# Altium PCB USB to Serial Programmer.PcbDoc
Units mm, origin at the board's own origin, x right, y up, seen from the top; angles counter-clockwise.
Board outline 17.23 x 33.97 mm, 2 copper layers (Top Layer, Bottom Layer); 15 components, 19 nets, 57 pads, 20 vias.
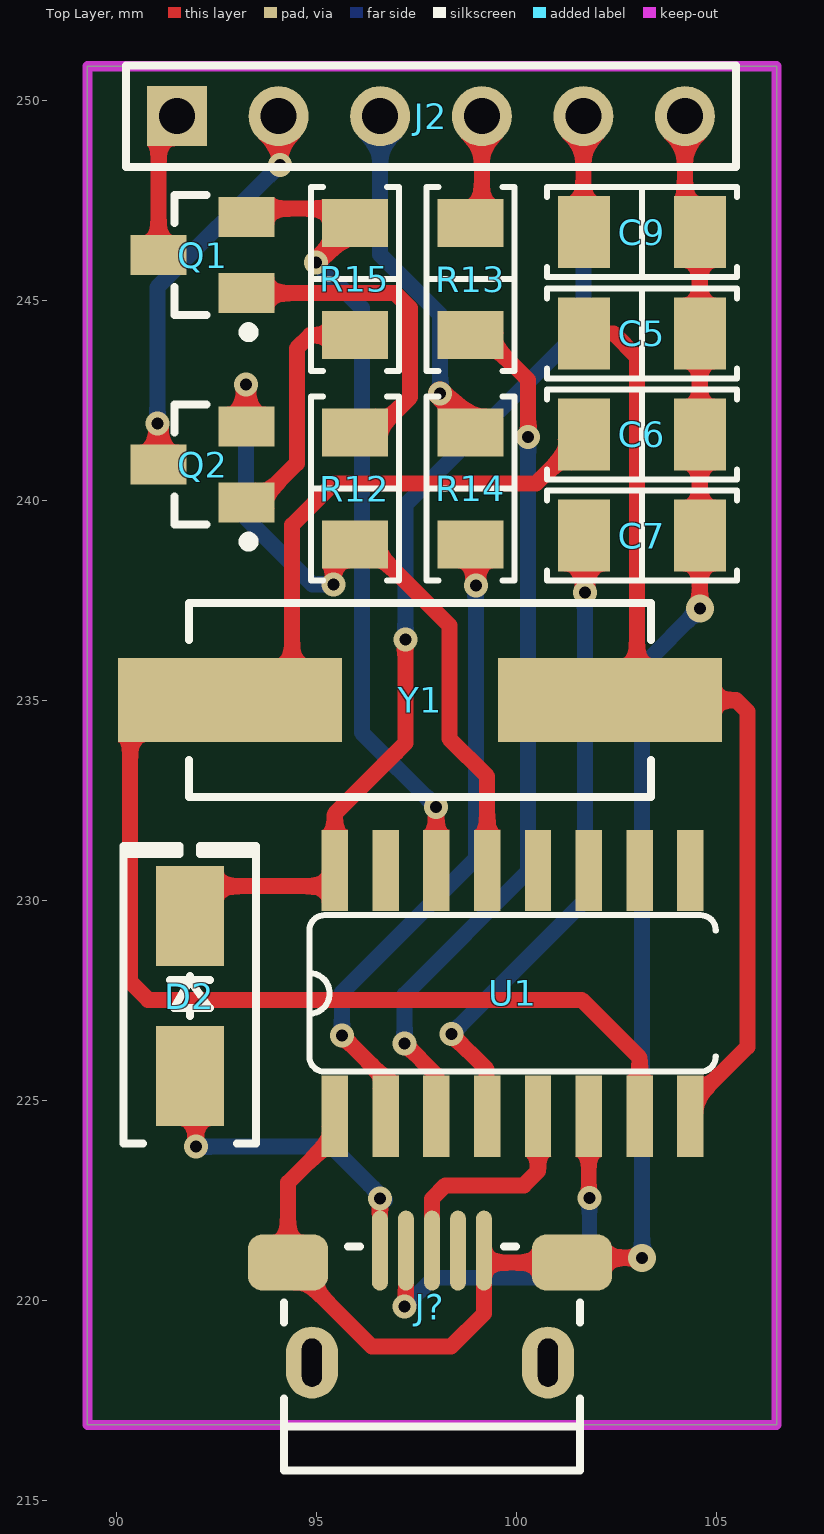
[diagram p0: Top Layer view]
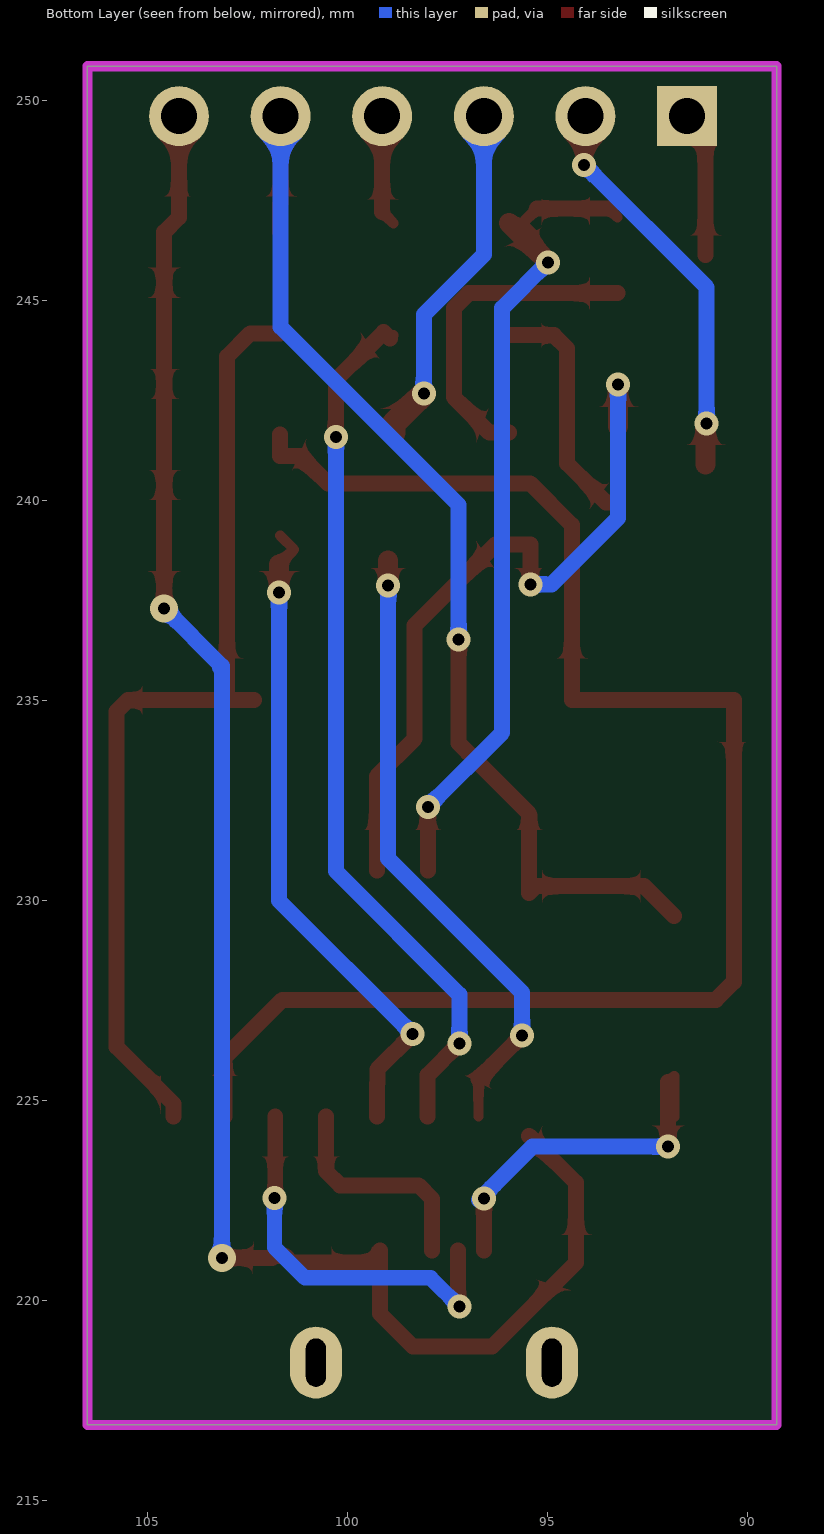
[diagram p1: Bottom Layer view, seen from below]
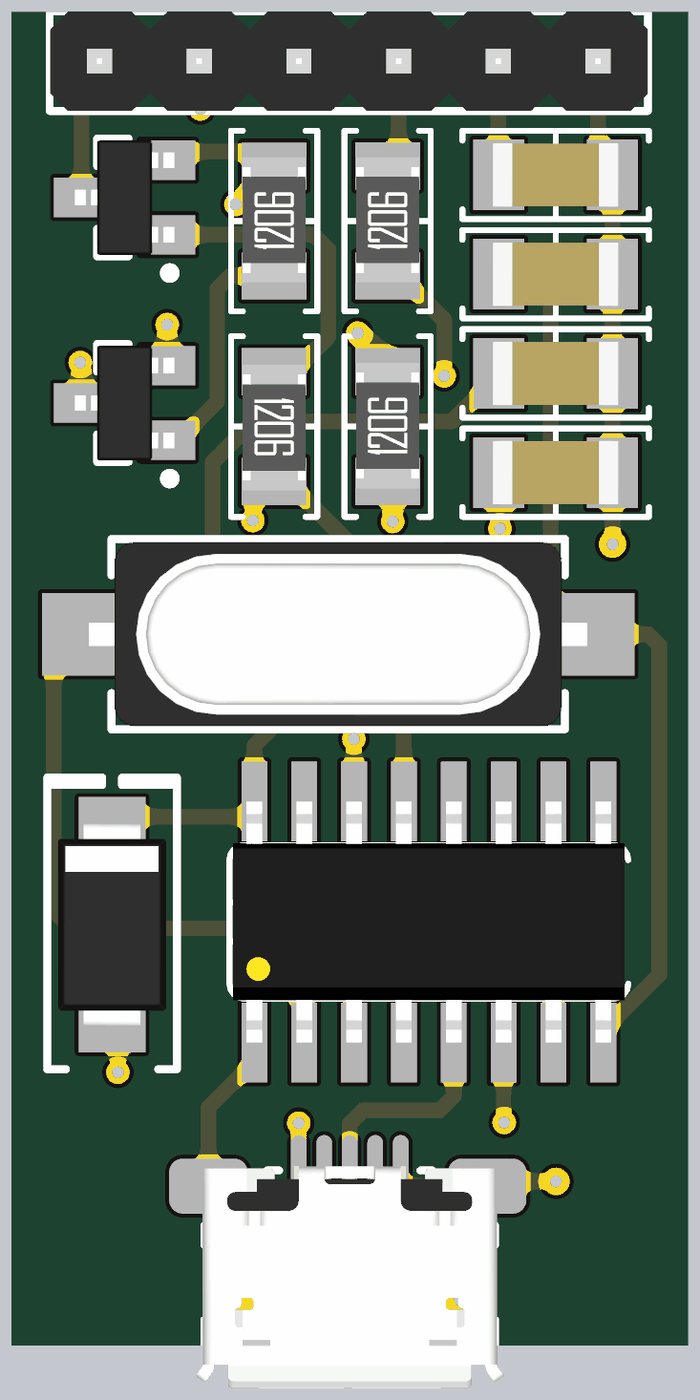
[diagram p2: 3D render of the assembled board from above, using the file's embedded part models]

## Layer stack, top to bottom
Top Solder: solder mask 0.0102, Solder Resist, Dk 3.5
Top Layer: signal copper 0.0356
Dielectric 1: dielectric 0.32, FR-4, Dk 4.8
Bottom Layer: signal copper 0.0356
Bottom Solder: solder mask 0.0102, Solder Resist, Dk 3.5

## Board outline
89.281,216.88 106.51,216.88 106.51,250.85 89.281,250.85

## Design rules (kind name [scope] priority, off if disabled: settings)
Clearance [All] p1: gap=0.2 ignorepadtopadclearanceinfootprint=FALSE
DiffPairsRouting [All] p1: maxlimit=0.254 minlimit=0.254 mostfreqgap=0.254 toplayer_minwidth=0.381 toplayer_maxwidth=0.381 toplayer_prefwidth=0.381 bottomlayer_minwidth=0.381 bottomlayer_maxwidth=0.381 bottomlayer_prefwidth=0.381 maxuncoupledlength=12.7
PolygonConnect [All] p1: connectstyle=Relief reliefconductorwidth=0.254 reliefentries=4 polygonreliefangle="90 Angle" airgapwidth=0.254
RoomDefinition "USB to Serial Programmer" [InComponentClass('USB to Serial Programmer')] p1: confinementstyle=ConfineIn formatcopy=TRUE lockcomponents=FALSE outline 124.943,58.154 144.247,58.154 144.247,75.807 124.943,75.807
RoutingVias [All] p1: holewidth=0.3 width=0.6 viastyle="Through Hole" minholewidth=0.3 minwidth=0.6 maxholewidth=0.3 maxwidth=0.6
SMDNeckDown [All] p1: percent=50.000
SolderMaskExpansion [All] p1: expansion=0.102
UnConnectedPin [All] p1:
UnRoutedNet [All] p1: checkbadconnections=TRUE
Width [InNet('GND')] p1: maxlimit=0.4 minlimit=0.4 preferedwidth=0.4
28 further rules are at their usual default settings.

## Classes and differential pairs
differential pair D: +D_P -D_N

## Components (designator, comment, footprint, x,y, rotation, side; value= is the part's Value field where it differs from the comment)
C5 "22pF" "CAP 1206/3216" 103.14,244.172 r180 top value=0.1uF
C6 "22pF" "CAP 1206/3216" 103.14,241.643 r180 top value=0.1uF
C7 "100nF" "CAP 1206/3216" 103.14,239.115 r180 top value=0.1uF
C9 "100nF" "CAP 1206/3216" 103.14,246.7 r180 top value=0.1uF
D2 "1N4007/M7(DO-214AC)" "DO214AC SMA" 91.84,227.6 r90 top
J2 "6 Pin" "HDR 1X6" 91.52,249.6 r0 top
J? "USB Micro" "FCI USB 10118193-0001LF" 97.895,218.54 r180 top
Q1 "S8050" SOT23 92.16,246.125 r180 top
Q2 "S8050" SOT23 92.16,240.89 r180 top
R12 "12K" "RES 1206/3216" 95.97,240.29 r270 top value=1K
R13 "470R" "RES 1206/3216" 98.86,245.525 r90 top value=1K
R14 "470R" "RES 1206/3216" 98.86,240.29 r90 top value=1K
R15 "12K" "RES 1206/3216" 95.97,245.525 r90 top value=1K
U1 "CH340" SO16 99.91,227.67 r0 top
Y1 "12Mhz" xtal 97.6,235 r180 top

## Footprints (in the part's own frame and the unit in brackets; to place one, negate y for a bottom-side part, rotate by r counter-clockwise, add the part's x,y. Pads: shape width x height; smd on the part's side, far side on the other; paste and mask are expansions set on the pad)
"CAP 1206/3216" [mm] "Chip Capacitor, 2-Leads, Body 3.25x1.60mm, IPC Medium Density"
  rect 1.3x1.8 smd: 1(-1.45,0) 2(1.45,0)
  silkscreen extent -2.38,-1.12 2.37,1.13, body extent -1.6,-0.81 1.6,0.81, height 1.62
"DO214AC SMA" [mm] "Molded Diode, 2-Leads, Body 4.30x2.60mm, IPC Medium Density"
  rect 2.5x1.7 smd: 1(-2,0) 2(2,0)
  silkscreen extent -3.68,-1.65 3.75,1.65, body extent -2.6,-1.37 2.6,1.37, height 2.4
"FCI USB 10118193-0001LF" [mm] "USB 2.0 Type B Micro"
  oval 0.4x2 smd: 1(1.3,-2.7) 2(0.65,-2.7) 3(0,-2.7) 4(-0.65,-2.7) 5(-1.3,-2.7)
  rrect50% 2x1.4 smd: S(-3.5,-2.4) S(3.6,-2.4)
  oval 1.3x1.8 hole 0.5 slot 1.2 at 90 deg: S(-2.9,0.1) S(3,0.1)
  silkscreen extent -3.7,-2.8 3.7,2.8, body extent -3.93,-2.9 3.93,2.76, height 2.78
"HDR 1X6" [mm] "Connector; Header; 6 Position"
  rect 1.5x1.5 hole 0.9: 1(0,0)
  round 1.5 hole 0.9: 2(2.54,0) 3(5.08,0) 4(7.62,0) 5(10.16,0) 6(12.7,0)
  silkscreen extent -1.27,-1.27 13.97,1.27, body extent -1.26,-1.27 13.97,1.26, height 8.51
"RES 1206/3216" [mm] "Chip Resistor, 2-Leads, Body 3.13x1.55mm, IPC Medium Density"
  rect 1.2x1.65 smd: 1(-1.4,0) 2(1.4,0)
  silkscreen extent -2.3,-1.1 2.3,1.1, body extent -1.57,-0.8 1.62,0.8, height 0.6
SO16 [mil]
  rect 26x80 smd: 1(-175,-121) 2(-125,-121) 3(-75,-121) 4(-25,-121) 5(25,-121) 6(75,-121) 7(125,-121) 8(175,-121) 9(175,121) 10(125,121) 11(75,121) 12(25,121) 13(-25,121) 14(-75,121) 15(-125,121) 16(-175,121)
  silkscreen extent -200,-77 200,77, body extent -196,-121 196,121, height 70
SOT23 [mm]
  rect 1.4x1 smd: B(-1.1,0.95) C(1.1,0) E(-1.1,-0.95)
  silkscreen extent -1.27,-1.5 0.7,2.05, body extent -1.27,-1.46 1.27,1.46, height 1
xtal [mm] "Crystal, 2-Leads, Body 4.70x11.40mm, Pitch 8.80mm, IPC Medium Density"
  rect 5.6x2.1 smd: 1(-4.75,0) 2(4.75,0)
  silkscreen extent -5.78,-2.43 5.77,2.43, body extent -6.35,-2.35 6.35,2.35, height 4.2

## Part data
C5 C6 C7 C9: library part Capacitor, "SMT Capacitor"
D2: library part Diode, "Rectifier Diode"
J?: library part "USB 2.0 Type B Micro"
Q1 Q2: library part 2N2222, "NPN", De="Seyed Mohsen Ghasemian", E-mail=picpars@gmail.com, web=www.picpars.com
R12 R13 R14 R15: library part Resistor, "SMT Resistor"
U1: Package=None, Availability=Bad, MF="Eaton / Cutler Hammer", MP=CH340, Price="223.47 USD"
Y1: library part xtal, "SMT Crystal"

## Via types
v1: diameter 0.6, hole 0.3, Top Layer to Bottom Layer, 18 vias
v2: diameter 0.7, hole 0.3, Top Layer to Bottom Layer, 2 vias

## Nets (pads, with @x,y where several pads share a name; then routed paths per layer and width w, separated by ;. In a path a pad name is that pad's centre, name@x,y a point inside that pad or via, vN(x,y) a via of type N, cw(c..) or ccw(c..) an arc to the next point about the centre after c; other vN are vias at no path point)
D_N: J?.2 U1.6 | length 9.7
  Top Layer w0.2: v1(97.206,219.837) v1@97.245,219.876
  Top Layer w0.381: v1@101.815,222.825 U1.6
  Top Layer w0.4: v1@97.245,219.876 J?.2
  Bottom Layer w0.381: v1(97.206,219.837) 97.929,220.56 101.07,220.56 101.83,221.32 v1(101.83,222.56)
D_P: J?.3 U1.5 | length 5.6
  Top Layer w0.4: J?.3 97.895,222.535 98.23,222.87 100.19,222.87 100.545,223.225 U1.5
GND: C5.1 C6.1 C7.1 C9.1 J2.6 J?.5 J?.S U1.1 | length 44.9
  Top Layer w0.4: U1.1@95.465,224.11 94.295,222.94 94.295,220.94 96.395,218.84 98.37,218.84 99.195,219.665 J?.5@99.195,220.94 ; J?.5 J?.5@99.195,220.94 ; J?.S@101.228,220.772 J?.S@101.395,220.94 ; v2(103.15,221.06) 101.9,221.06 101.85,221.11 101.565,221.11 J?.S@101.395,220.94 ; J2.6 104.22,247.07 C9.1 C5.1 104.59,242.9 C6.1 C7.1 v2(104.59,237.294) ; J?.5@99.195,220.94 J?.S@101.395,220.94
  Bottom Layer w0.4: v2(103.15,221.06) 103.15,235.774 103.19,235.814 103.15,235.854 v2(104.59,237.294)
GPIO0: J2.2 Q2.C | length 10
  Top Layer w0.254: v1(91.03,241.92) v1@91.06,241.89 ; J2.2 J2.2@94.09,249.57
  Top Layer w0.4: v1(94.09,248.38) J2.2@94.09,249.57
  Top Layer w0.5: Q2.C v1@91.06,241.89
  Bottom Layer w0.4: v1(91.03,241.92) 91.03,245.32 v1(94.09,248.38)
NetC7_2: C7.2 U1.4 | length 16.6
  Top Layer w0.254: C7.2 101.346,238.771 C7.2@101.72,238.397
  Top Layer w0.4: v1(98.38,226.65) 99.26,225.77 99.26,225.43 99.275,225.415 U1.4
  Top Layer w0.5: v1(101.72,237.69) C7.2@101.72,238.397
  Bottom Layer w0.4: v1(98.38,226.65) 101.72,229.99 v1(101.72,237.69)
NetQ1_B: Q1.B R12.1 | length 8.2
  Top Layer w0.4: Q1.B 96.977,245.175 97.35,244.802 97.35,242.578 96.462,241.69 R12.1
NetQ1_E: Q1.E R15.2 U1.14 | length 21.1
  Top Layer w0.254: Q1.E Q1.E@93.475,247.29 ; v1(94.996,245.948) v1@94.996,245.951 ; R15.2@95.27,247.29 R15.2@95.636,246.925 ; R15.2@95.379,246.668 R15.2@95.636,246.925 ; R15.2 R15.2@95.636,246.925 ; U1.14@98,230.748 U1.14
  Top Layer w0.4: Q1.E@93.475,247.29 R15.2@95.27,247.29 ; U1.14@98,230.748 v1(98,232.33)
  Top Layer w0.5: v1@94.996,245.951 R15.2
  Bottom Layer w0.4: v1(94.996,245.948) 96.14,244.804 96.14,234.19 v1(98,232.33)
NetQ2_B: Q2.B R15.1 | length 6.1
  Top Layer w0.4: Q2.B 93.54,239.94 94.52,240.92 94.52,243.796 94.849,244.125 R15.1
NetQ2_E: Q2.E R12.2 U1.13 | length 18.5
  Top Layer w0.254: Q2.E@93.243,241.84 Q2.E
  Top Layer w0.4: v1(95.428,237.896) 95.428,238.89 R12.2 96.31,238.89 98.33,236.87 98.33,234.04 99.275,233.095 U1.13
  Top Layer w0.5: Q2.E@93.243,241.84 v1(93.243,242.887)
  Bottom Layer w0.4: v1(93.243,242.887) 93.243,239.557 94.904,237.896 v1(95.428,237.896)
NetR13_1: R13.1 U1.3 | length 22.1
  Top Layer w0.254: R13.1 R13.1@98.945,244.04
  Top Layer w0.4: v1(97.21,226.42) 98.005,225.625 U1.3 ; R13.1@98.945,244.04 99.105,244.2 100.3,243.005 v1(100.3,241.58)
  Bottom Layer w0.4: v1(97.21,226.42) 97.21,227.64 100.3,230.73 v1(100.3,241.58)
NetR14_1: R14.1 U1.2 | length 15.7
  Top Layer w0.254: U1.2 U1.2@96.735,225.525
  Top Layer w0.4: v1(95.64,226.62) U1.2@96.735,225.525
  Top Layer w0.5: v1(98.99,237.87) R14.1@98.99,238.49
  Bottom Layer w0.4: v1(95.64,226.62) 95.64,227.69 98.99,231.04 v1(98.99,237.87)
nRST: J2.1 Q1.C | length 3.7
  Top Layer w0.254: J2.1@91.06,249.14 J2.1
  Top Layer w0.4: Q1.C J2.1@91.06,249.14
OTG_ID: J?.4
RXD0: J2.3 R14.2 | length 8.8
  Top Layer w0.6: v1(98.1,242.67) 98.86,241.91 R14.2
  Bottom Layer w0.4: J2.3 96.6,246.14 98.1,244.64 v1(98.1,242.67)
TXD0: J2.4 R13.2 | length 2.8
  Top Layer w0.254: R13.2 R13.2@99.14,247.205
  Top Layer w0.4: R13.2@99.14,247.205 J2.4
VDD5V: C9.2 D2.2 J2.5 U1.16 | length 28.9
  Top Layer w0.4: D2.2 92.59,230.35 95.3,230.35 95.465,230.185 U1.16 95.465,232.156 97.003,233.694 97,233.696 97.23,233.926 v1(97.23,236.52) ; J2.5 101.68,247.42 101.69,247.41 C9.2
  Bottom Layer w0.4: v1(97.23,236.52) 97.23,239.88 101.68,244.33 J2.5
VDDUSB: D2.1 J?.1 | length 9.4
  Top Layer w0.254: D2.1@91.84,224.587 D2.1 D2.1@91.99,225.45
  Top Layer w0.4: v1(91.99,223.84) D2.1@91.99,225.45 ; J?.1 v1(96.595,222.544)
  Bottom Layer w0.4: v1(91.99,223.84) 95.387,223.84 v1@96.613,222.615 ; v1(96.595,222.544) 96.683,222.544 v1@96.723,222.504
XI: C6.2 U1.7 Y1.2 | length 39
  Top Layer w0.4: C6.2 101.69,241.11 101.19,241.11 100.5,240.42 95.44,240.42 94.4,239.38 94.4,235 Y1.2 90.35,235 90.35,227.96 90.8,227.51 101.635,227.51 103.085,226.06 U1.7
XO: C5.2 U1.8 Y1.1 | length 24.4
  Top Layer w0.4: C5.2 102.438,244.172 103.02,243.59 Y1.1@103.02,235 ; Y1.1 Y1.1@103.02,235 ; U1.8 104.355,224.905 105.78,226.33 105.78,234.72 105.5,235 Y1.1@103.02,235
pads on no net: U1.9 U1.10 U1.11 U1.12 U1.15

## Keep-outs
Keep-Out Layer:
  the board outline again, w0.254

## Silkscreen, mask and mechanical layers (free items; w line width, h text height)
Top Overlay:
  region: 200.59,260.19